# Altium PCB PCB1.PcbDoc
Units mm, origin at the board's own origin, x right, y up, seen from the top; angles counter-clockwise.
Board outline 99.95 x 70 mm, 2 copper layers (Top Layer, Bottom Layer); 13 components, 85 nets, 156 pads, 0 vias.
Unrouted connection lines stored in the file: 68.
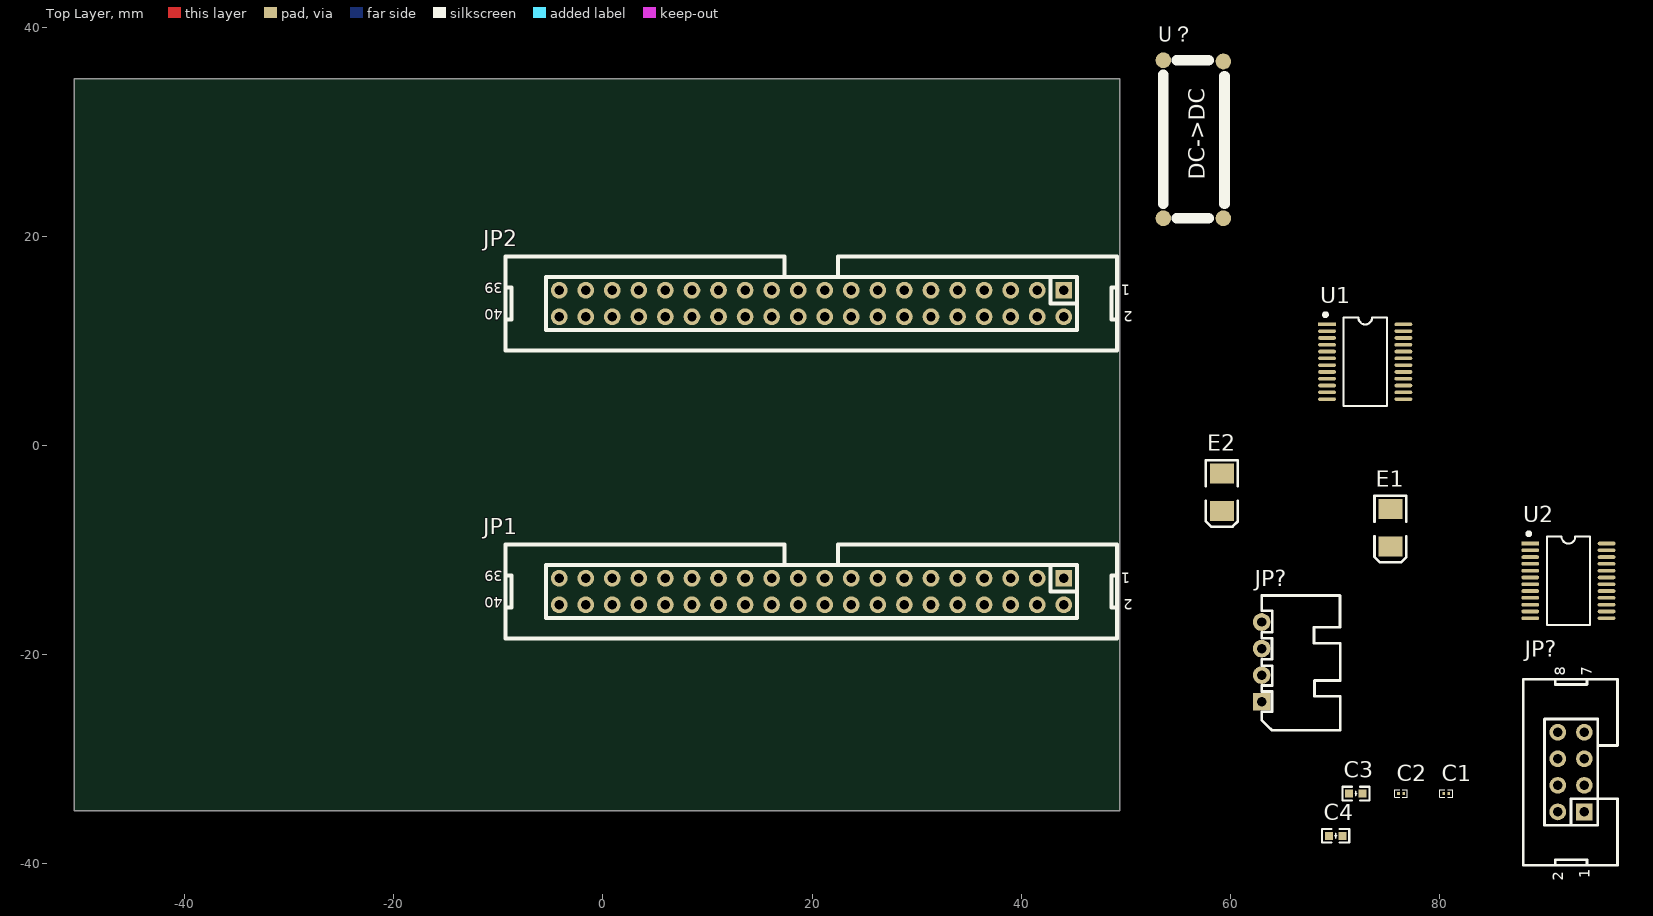
[diagram p0: Top Layer view]
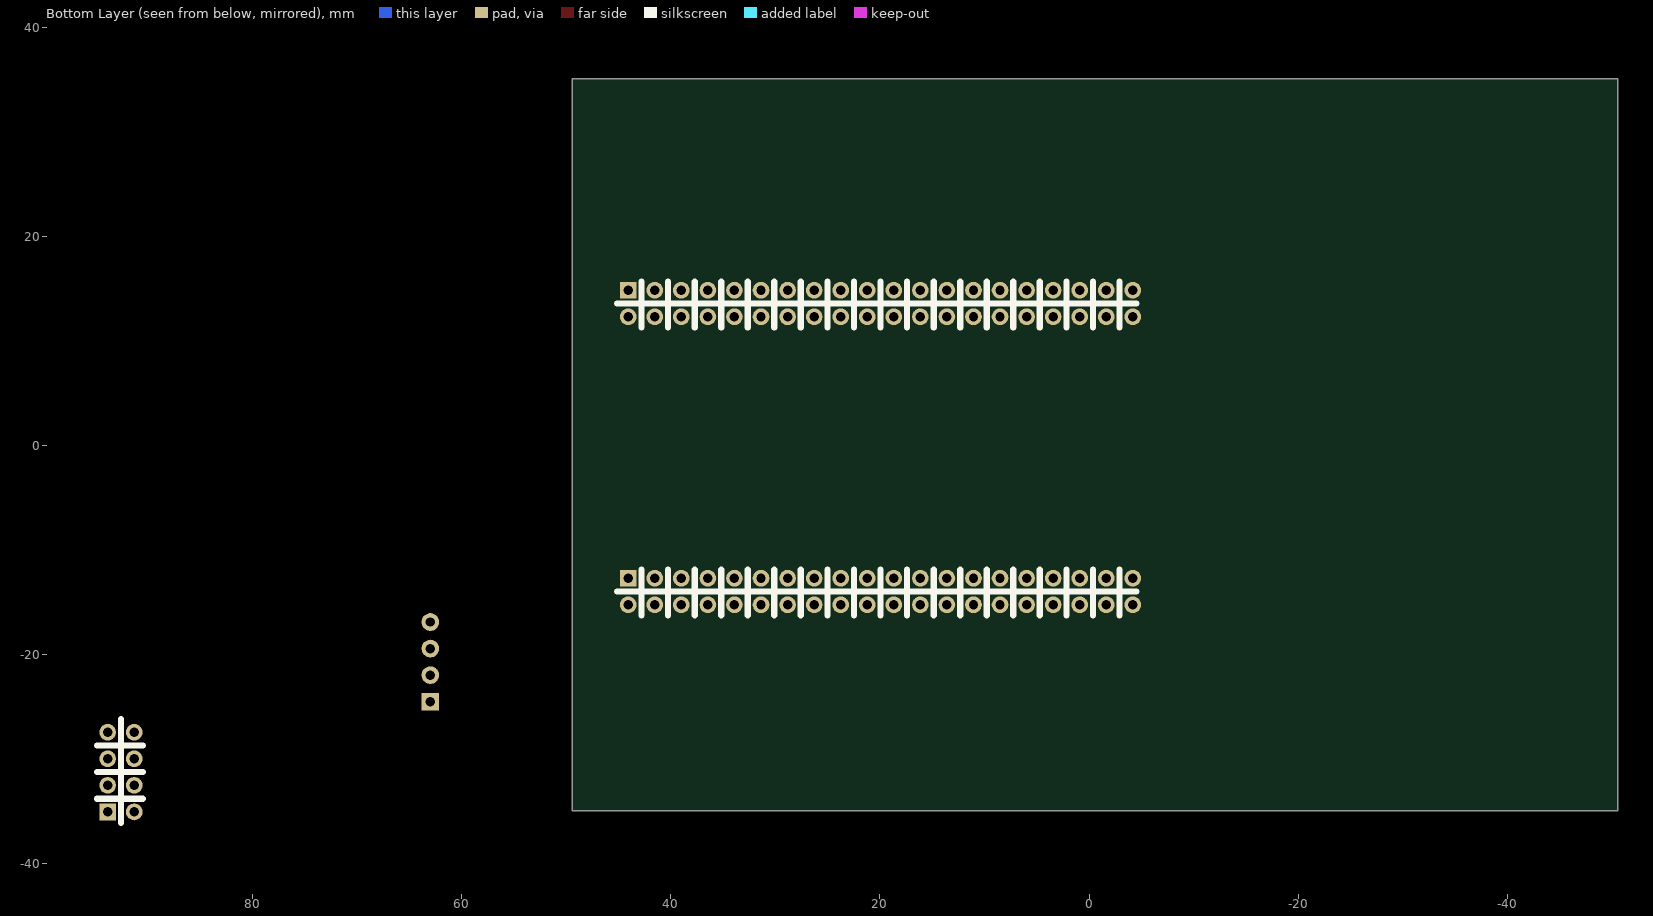
[diagram p1: Bottom Layer view, seen from below]

## Layer stack, top to bottom
Top Solder: solder mask 0.0102, Solder Resist, Dk 3.5
Top Layer: signal copper 0.0356
Dielectric 1: dielectric 0.32, FR-4, Dk 4.8
Bottom Layer: signal copper 0.0356
Bottom Solder: solder mask 0.0102, Solder Resist, Dk 3.5

## Board outline
-50.546,-34.948 -50.546,35.052 49.403,35.052 49.403,-34.948

## Design rules (kind name [scope] priority, off if disabled: settings)
BoardOutlineClearance [All] p1: gap=0.508 ignorepadtopadclearanceinfootprint=FALSE
Clearance Clearance_1 [InNetClass('ANT') vs InNet('GND')] p1: gap=0.508 ignorepadtopadclearanceinfootprint=TRUE
Clearance [All] p2: gap=0.152 ignorepadtopadclearanceinfootprint=TRUE except(0.305: Arc-Fill Arc-Poly Arc-Region Track-Fill Track-Poly Track-Region SMDPad-Fill SMDPad-Poly SMDPad-Region THPad-Fill THPad-Poly THPad-Region Fill-Fill Fill-Poly Fill-Region Poly-Poly Poly-Region Region-Region)
DiffPairsRouting DiffPair_90OMDiffPairsRouting [InDifferentialPair ('USB')] p1: maxlimit=0.178 minlimit=0.178 mostfreqgap=0.178 toplayer_minwidth=0.127 toplayer_maxwidth=0.127 toplayer_prefwidth=0.127 bottomlayer_minwidth=0.127 bottomlayer_maxwidth=0.127 bottomlayer_prefwidth=0.127 maxuncoupledlength=12.7
DiffPairsRouting DiffPairsRouting_1 [InDifferentialPair ('USB')] p2: maxlimit=0.178 minlimit=0.178 mostfreqgap=0.178 toplayer_minwidth=0.127 toplayer_maxwidth=0.127 toplayer_prefwidth=0.127 bottomlayer_minwidth=0.127 bottomlayer_maxwidth=0.127 bottomlayer_prefwidth=0.127 maxuncoupledlength=12.7
DiffPairsRouting [All] p3: maxlimit=0.254 minlimit=0.254 mostfreqgap=0.254 toplayer_minwidth=0.381 toplayer_maxwidth=0.381 toplayer_prefwidth=0.381 bottomlayer_minwidth=0.381 bottomlayer_maxwidth=0.381 bottomlayer_prefwidth=0.381 maxuncoupledlength=12.7
MatchedLengths DiffPair_90OMMatchedLengths [InDifferentialPair ('USB')] p1: tolerance=0.127 checknetsindiffpair=TRUE checkdiffpairvsdiffpair=FALSE checkxsignals=FALSE checkothers=FALSE
MatchedLengths [InDifferentialPair ('USB')] p2: tolerance=25.4 checknetsindiffpair=FALSE checkdiffpairvsdiffpair=TRUE checkxsignals=TRUE checkothers=TRUE
PlaneClearance [All] p1: clearance=0.191
PlaneConnect [All] p1: planeconnectstyle=Direct reliefexpansion=0.508 reliefentries=4 reliefconductorwidth=0.254 reliefairgap=0.254
PolygonConnect [All] p1: connectstyle=Direct reliefconductorwidth=0.508 reliefentries=4 polygonreliefangle="90 Angle" airgapwidth=0.254
RoutingVias [All] p1: holewidth=0.305 width=0.61 viastyle="Through Hole" minholewidth=0.305 minwidth=0.61 maxholewidth=0.305 maxwidth=0.61
SolderMaskExpansion [All] p1: expansion=0.064 istentingtop=FALSE
UnRoutedNet [All] p1: checkbadconnections=TRUE
Width PWR [InNetClass('PWR')] p1: maxlimit=2.54 minlimit=0.254 preferedwidth=0.508
Width [All] p2: maxlimit=0.508 minlimit=0.152 preferedwidth=0.152
26 further rules are at their usual default settings.

## Classes and differential pairs
component class Sheet1: C1 C2 C3 C4 E1 E2 JP1 JP2 JP? U1 U2 U？

## Components (designator, comment, footprint, x,y, rotation, side; value= is the part's Value field where it differs from the comment)
C1 "104" C0201_L 80.645,-33.296 r0 top
C2 "104" C0201_L 76.327,-33.296 r0 top
C3 "104" C0603_L 72.009,-33.296 r0 top
C4 "104" C0603_L 70.071,-37.341 r0 top
E1 "10uF/10V" C_3528 75.311,-7.874 r90 top
E2 "10uF/10V" C_3528 59.182,-4.467 r90 top
JP1 "Header 2X11" IDC2.54-LI-2x20P 44.069,-12.7 r180 top
JP2 "Header 2X11" IDC2.54-LI-2x20P 44.069,14.84 r180 top
JP? "Header 4X2" IDC2.54-LI-2x4P 93.853,-35.052 r90 top
JP? "HDR-1X4" XH2.54-WI-4P 62.992,-20.701 r90 top
U1 "TB6612_Front" SSOP24 72.898,8.001 r0 top
U2 "TB6612_Back" SSOP24 92.329,-12.954 r0 top
U？ "DC-DC" DC-DC 53.594,21.717 r90 top

## Footprints (in the part's own frame and the unit in brackets; to place one, negate y for a bottom-side part, rotate by r counter-clockwise, add the part's x,y. Pads: shape width x height; smd on the part's side, far side on the other; paste and mask are expansions set on the pad)
C0201_L [mm] "无极性贴片电容"
  rect 0.25x0.3 smd: 1(-0.25,0) 2(0.25,0)
  silkscreen extent -0.6,-0.35 0.6,0.35, body extent -0.3,-0.16 0.3,0.16, height 0.31
C0603_L [mil] "无极性贴片电容"
  rect 30x30 smd: 1(-25.59,0) 2(25.59,0)
  silkscreen extent -51,-26 51,26, body extent -31,-16 31,16, height 32
C_3528 [mil] "长3.5mm，宽2.8mm，厚1.9mm      淘宝ID:黄晶宝石"
  rect 75x90 smd: 1(-70.87,-0.01) 2(70.86,-0.01)
  silkscreen extent -130,-60 120,60, body extent -69,-55 69,55, height 75
DC-DC [mm] "降压模块"
  round 1.5 smd mask+0.102: 1(0,0)
  round 1.5 smd mask+0.064: 2(0,-5.74) 3(15.113,0) 4(15,-5.74)
  silkscreen extent 0,-5.84 15.11,0
IDC2.54-LI-2x4P [mm] "8P简易牛角座 淘宝ID:黄晶宝石   店铺网址:https://shop463601444.taobao.com"
  rect 1.6x1.6 hole 0.9: 1(0,0)
  round 1.6 hole 0.9: 2(0,2.54) 3(2.54,0) 4(2.54,2.54) 5(5.08,0) 6(5.08,2.54) 7(7.62,0) 8(7.62,2.54)
  silkscreen extent -5.11,-3.18 12.7,5.84, body extent -5.08,-3.08 12.7,5.77, height 9.17
IDC2.54-LI-2x20P [mm] "40P简易牛角座 淘宝ID:黄晶宝石   店铺网址:https://shop463601444.taobao.com"
  rect 1.6x1.6 hole 0.9: 1(0,0)
  round 1.6 hole 0.9: 2(0,2.54) 3(2.54,0) 4(2.54,2.54) 5(5.08,0) 6(5.08,2.54) 7(7.62,0) 8(7.62,2.54) 9(10.16,0) 10(10.16,2.54) 11(12.7,0) 12(12.7,2.54) 13(15.24,0) 14(15.24,2.54) 15(17.78,0) 16(17.78,2.54) 17(20.32,0) 18(20.32,2.54) 19(22.86,0) 20(22.86,2.54) 21(25.4,0) 22(25.4,2.54) 23(27.94,0) 24(27.94,2.54) 25(30.48,0) 26(30.48,2.54) 27(33.02,0) 28(33.02,2.54) 29(35.56,0) 30(35.56,2.54) 31(38.1,0) 32(38.1,2.54) 33(40.64,0) 34(40.64,2.54) 35(43.18,0) 36(43.18,2.54) 37(45.72,0) 38(45.72,2.54) 39(48.26,0) 40(48.26,2.54)
  silkscreen extent -5.11,-3.23 53.37,5.77, body extent -5.08,-3.08 53.34,5.77, height 9.17
SSOP24 [mm] "8.3*7.8*1.6"
  rect 1.7x0.35 smd: 1(-3.65,3.575)
  oval 1.7x0.35 smd: 2(-3.65,2.925) 3(-3.65,2.275) 4(-3.65,1.625) 5(-3.65,0.975) 6(-3.65,0.325) 7(-3.65,-0.325) 8(-3.65,-0.975) 9(-3.65,-1.625) 10(-3.65,-2.275) 11(-3.65,-2.925) 12(-3.65,-3.575) 13(3.65,-3.575) 14(3.65,-2.925) 15(3.65,-2.275) 16(3.65,-1.625) 17(3.65,-0.975) 18(3.65,-0.325) 19(3.65,0.325) 20(3.65,0.975) 21(3.65,1.625) 22(3.65,2.275) 23(3.65,2.925) 24(3.65,3.575)
  silkscreen extent -3.93,-4.23 2.06,4.63, body extent -3.85,-4.15 3.85,4.15, height 1.65
XH2.54-WI-4P [mm] "接插件，4P"
  rect 1.7x1.7 hole 0.9: 1(-3.81,0)
  round 1.7 hole 0.9: 2(-1.27,0) 3(1.27,0) 4(3.81,0)
  silkscreen extent -6.53,-7.53 6.35,0, body extent -6.31,-7.35 6.31,0.35, height 5.73

## Part data
C1 C2 C3 C4: library part C, "贴片电容", BOM名称=无极性贴片电容, 唯一出售店铺网址=https://shop463601444.taobao.com, 淘宝ID="封装库来自淘宝 ID：黄晶宝石", 联系售后，技术支持=https://shop463601444.taobao.com
E1 E2: library part CE_SMD, "贴片电解电容", BOM名称=贴片电解电容, 版权归属="封装库来自淘宝 ID：黄晶宝石", 联系售后=https://item.taobao.com/item.htm?id=566775463719
JP1 JP2: library part "Header 20X2", "20*2P接插件", BOM名称=20*2P接插件, 学习资源=最新版本发布https://item.taobao.com/item.htm?id=566775463719, 版权归属="封装库来自淘宝 ID：黄晶宝石"
JP?: "4*2P接插件", BOM名称=4*2P接插件, 版权归属="封装库来自淘宝 ID：黄晶宝石"
JP?: library part "Header 4", "OLED屏幕", BOM名称=4P接插件, 学习资源=最新版本发布https://item.taobao.com/item.htm?id=566775463719, 版权归属="封装库来自淘宝 ID：黄晶宝石"
U1 U2: library part Component_1, "TB6612"

## Nets (pads, with @x,y where several pads share a name; then routed paths per layer and width w, separated by ;. In a path a pad name is that pad's centre, name@x,y a point inside that pad or via, vN(x,y) a via of type N, cw(c..) or ccw(c..) an arc to the next point about the centre after c; other vN are vias at no path point)
3.3V: C1.1 C3.1 JP2.3 JP2.4 JP?.3@62.992,-19.431 JP?.7 U1.20 U2.20 U？.4
5V: JP2.1 JP2.2
12V: C2.1 C4.1 E1.1 E2.1 U1.13 U1.14 U1.24 U2.13 U2.14 U2.24 U？.2
AO1: U1.1 U1.2 U2.1 U2.2
AO2: U1.5 U1.6 U2.5 U2.6
BO2: U1.7 U1.8 U2.7 U2.8
GND: C1.2 C2.2 C3.2 C4.2 E1.2 E2.2 JP1.1 JP1.2 JP?.4@62.992,-16.891 JP?.8 U1.3 U1.4 U1.9 U1.10 U1.18 U2.3 U2.4 U2.9 U2.10 U2.18 U？.1 U？.3
PA0: JP1.34
PA1: JP1.36
PA2: JP1.33
PA3: JP1.29
PA4_IRQ_24L01: JP1.32 JP?.1@93.853,-35.052
PA5_CSN_24L01: JP1.30 JP?.5
PA6_CE_24L01: JP1.27
PA7: JP1.25
PA8: JP2.12
PA9: JP2.9
PA10: JP2.8
PA11: JP2.5
PA12: JP2.6
PB0: JP1.26
PB1: JP1.21
PB2: JP1.24
PB3_Front_AIN1: JP2.34 U1.21
PB4_Front_AIN2: JP2.21 U1.22
PB5_Front_BIN1: JP2.22 U1.17
PB6_Front_BIN2: JP2.23 U1.16
PB7_BACK_AIN1: JP2.24 U2.21
PB8_I2C1_SCL: JP2.25 JP?.2@62.992,-21.971
PB9_I2C1_SDA: JP2.26 JP?.1@62.992,-24.511
PB10_SPI2_SCK: JP1.14
PB11: JP1.9
PB12: JP1.8
PB13: JP1.11
PB14: JP1.10
PB15: JP1.6
PC0: JP1.37
PC1: JP1.40
PC2_SPI2_MISO: JP1.39
PC3_SPI2_MOSI: JP1.31 JP?.3@93.853,-32.512
PC4: JP1.28
PC5: JP1.23
PC6: JP2.39
PC7: JP2.38
PC8: JP2.37
PC9: JP2.10
PC10: JP2.11
PC11: JP2.14
PC12: JP2.13
PD0: JP2.16
PD1: JP2.15
PD2: JP2.18
PD3: JP2.17
PD4: JP2.20
PD5_BACK_AIN2: JP2.19 U2.22
PD6_BACK_BIN1: JP2.36 U2.17
PD7_BACK_BIN2: JP2.35 U2.16
PD8: JP1.7
PD9: JP1.5
PD10: JP1.4
PD11: JP1.3
PD12: JP2.7
PD13: JP1.35
PD14: JP1.38
PD15: JP2.40
PE0: JP2.27
PE1: JP2.28
PE2: JP2.30
PE3: JP2.32
PE4: JP2.33
PE5: JP2.31
PE6: JP2.29
PE7: JP1.13
PE8: JP1.12
PE9: JP1.22
PE10: JP1.19
PE11: JP1.20
PE12: JP1.18
PE13: JP1.17
PE14: JP1.16
PE15: JP1.15
PO1: U1.11 U1.12 U2.11 U2.12
PWMA: U1.23 U2.23
PWMB: U1.15 U2.15
SYBY: U1.19 U2.19
pads on no net: JP?.2@91.313,-35.052 JP?.4@91.313,-32.512 JP?.6

## Text inside footprints (layer, text, board x,y; h text height)
JP1: Top Overlay "2" at 50.673,-14.732 h1.02 r180; Top Overlay "1" at 50.419,-12.192 h1.02 r180; Top Overlay "40" at -9.576,-14.529 h1.02 r180; Top Overlay "39" at -9.576,-11.989 h1.02 r180
JP2: Top Overlay "39" at -9.576,15.551 h1.02 r180; Top Overlay "40" at -9.576,13.011 h1.02 r180; Top Overlay "1" at 50.419,15.348 h1.02 r180; Top Overlay "2" at 50.673,12.808 h1.02 r180
JP?: Top Overlay "2" at 91.821,-41.656 h1.02 r90; Top Overlay "1" at 94.361,-41.402 h1.02 r90; Top Overlay "8" at 92.024,-22.047 h1.02 r90; Top Overlay "7" at 94.564,-22.047 h1.02 r90
U？: Top Overlay "DC->DC" at 57.531,25.4 h1.52 r90